# Altium PCB Node_TrashTrack.PcbDoc
Units mm, origin at the board's own origin, x right, y up, seen from the top; angles counter-clockwise.
Board outline 42.75 x 51.3 mm, 4 copper layers (Top Layer, GROUND, POWER, Bottom Layer), stack 1.541 mm thick; 41 components, 32 nets, 170 pads, 272 vias.
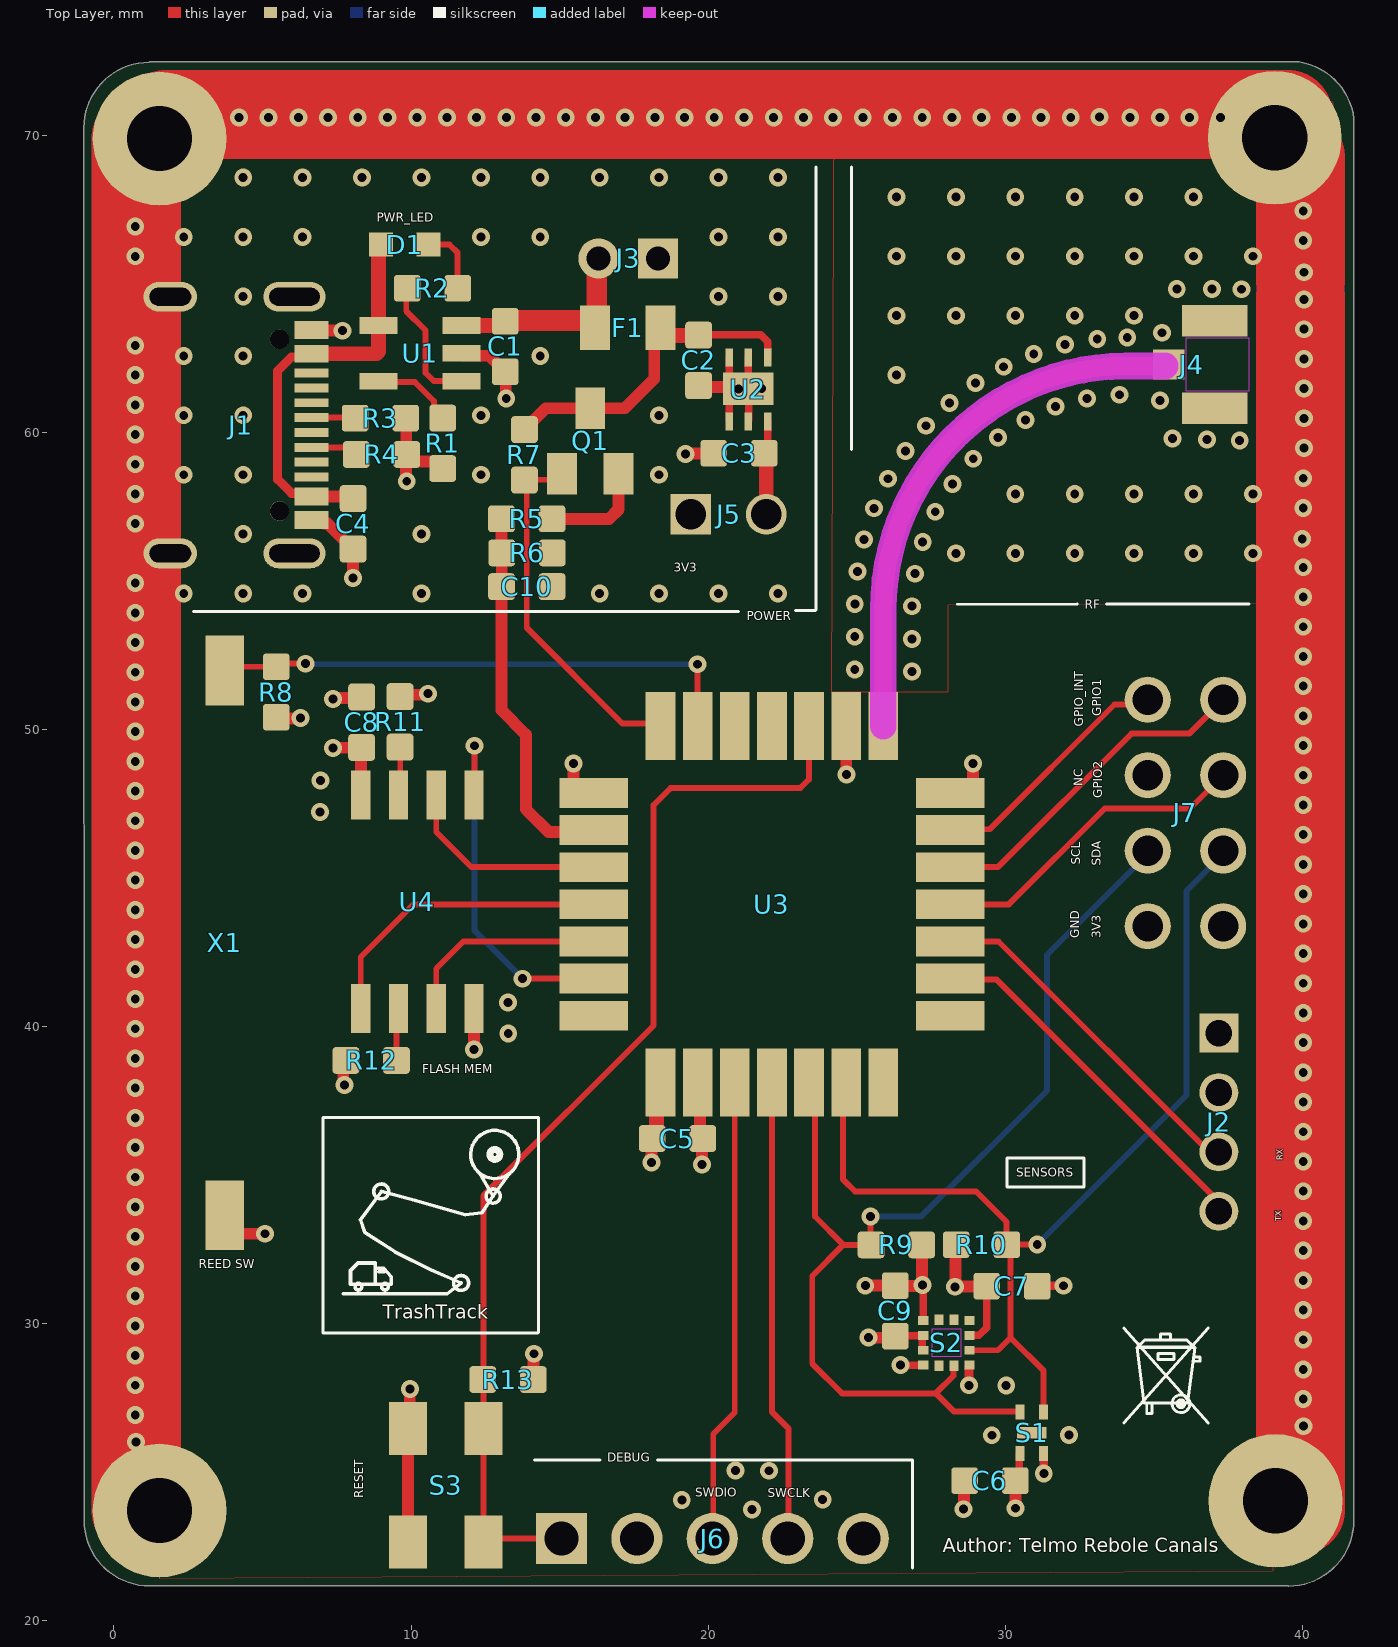
[diagram p0: Top Layer view]
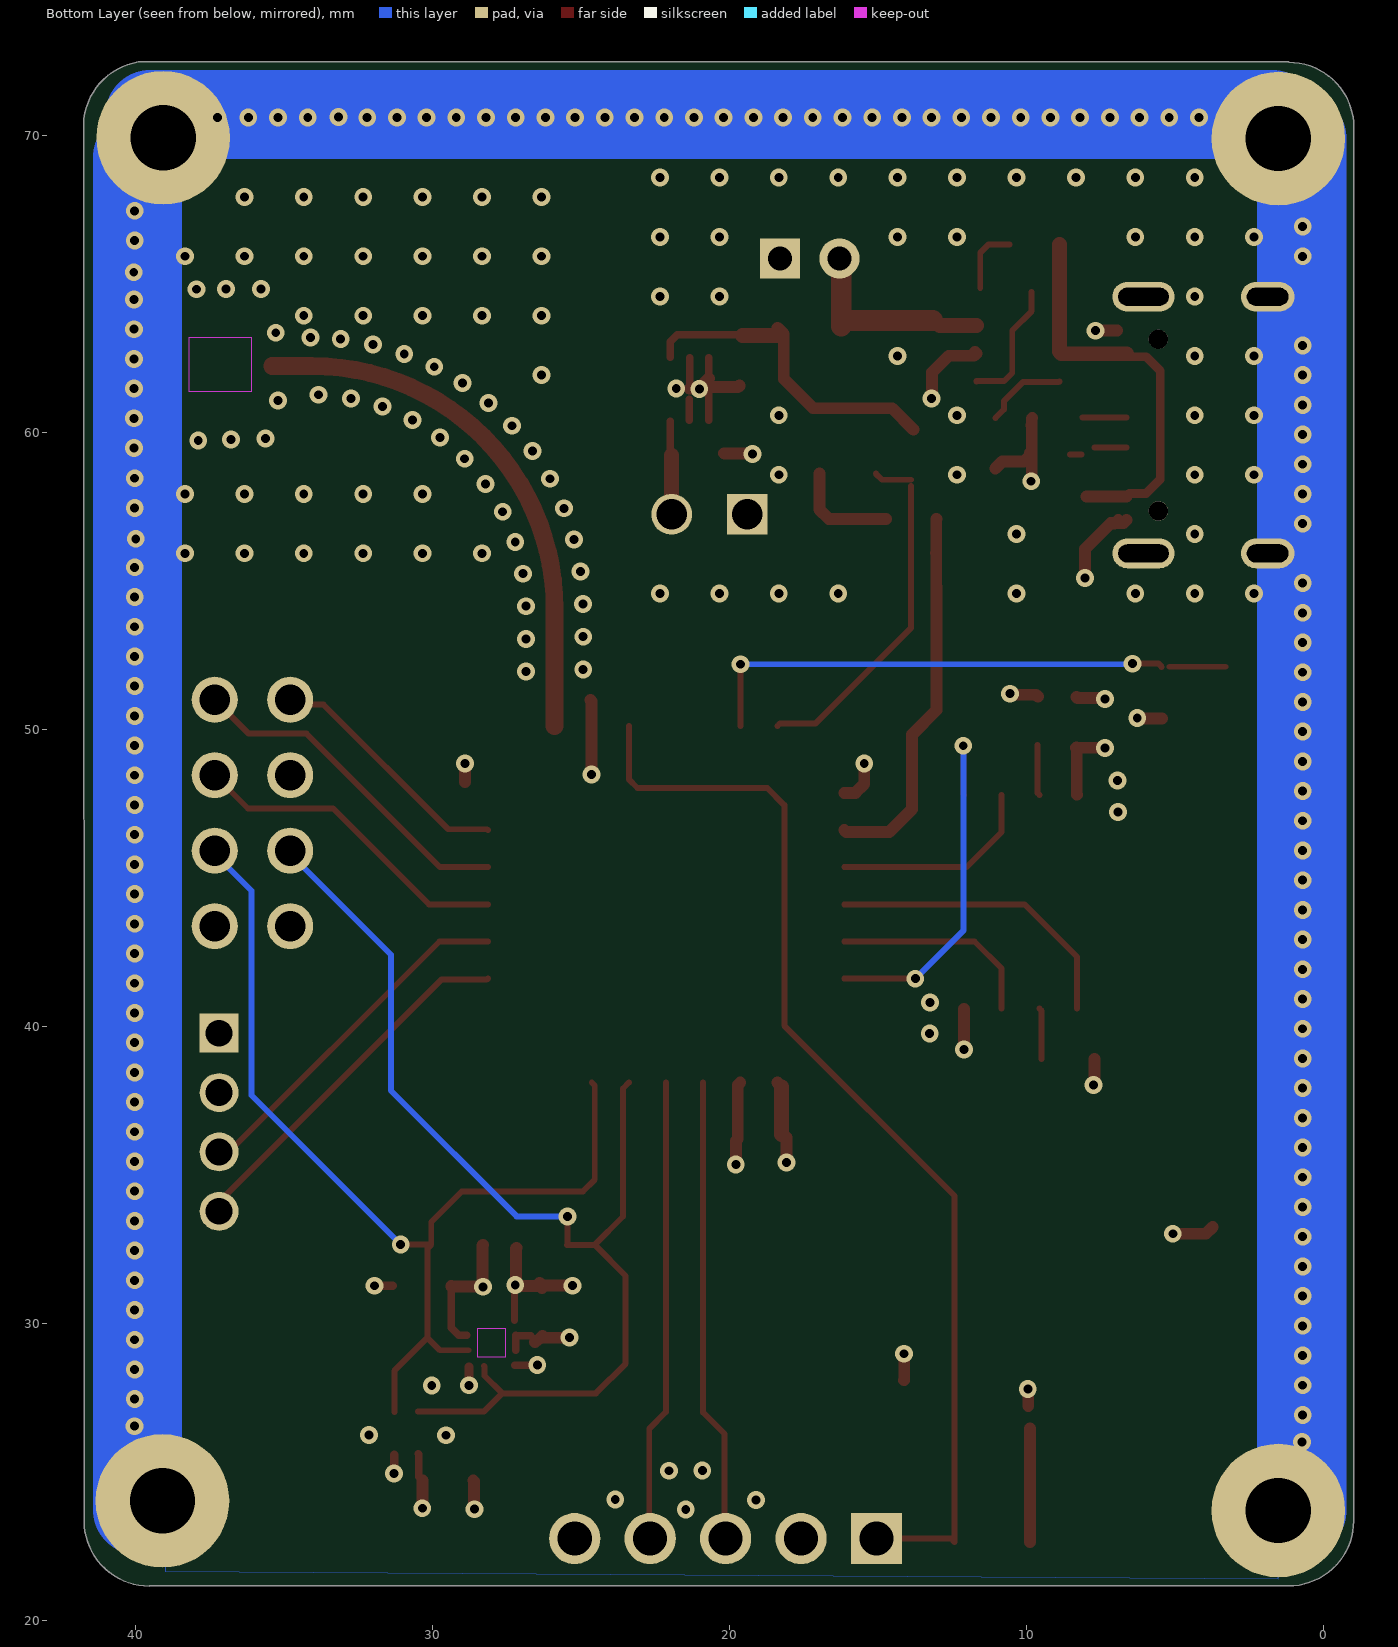
[diagram p1: Bottom Layer view, seen from below]
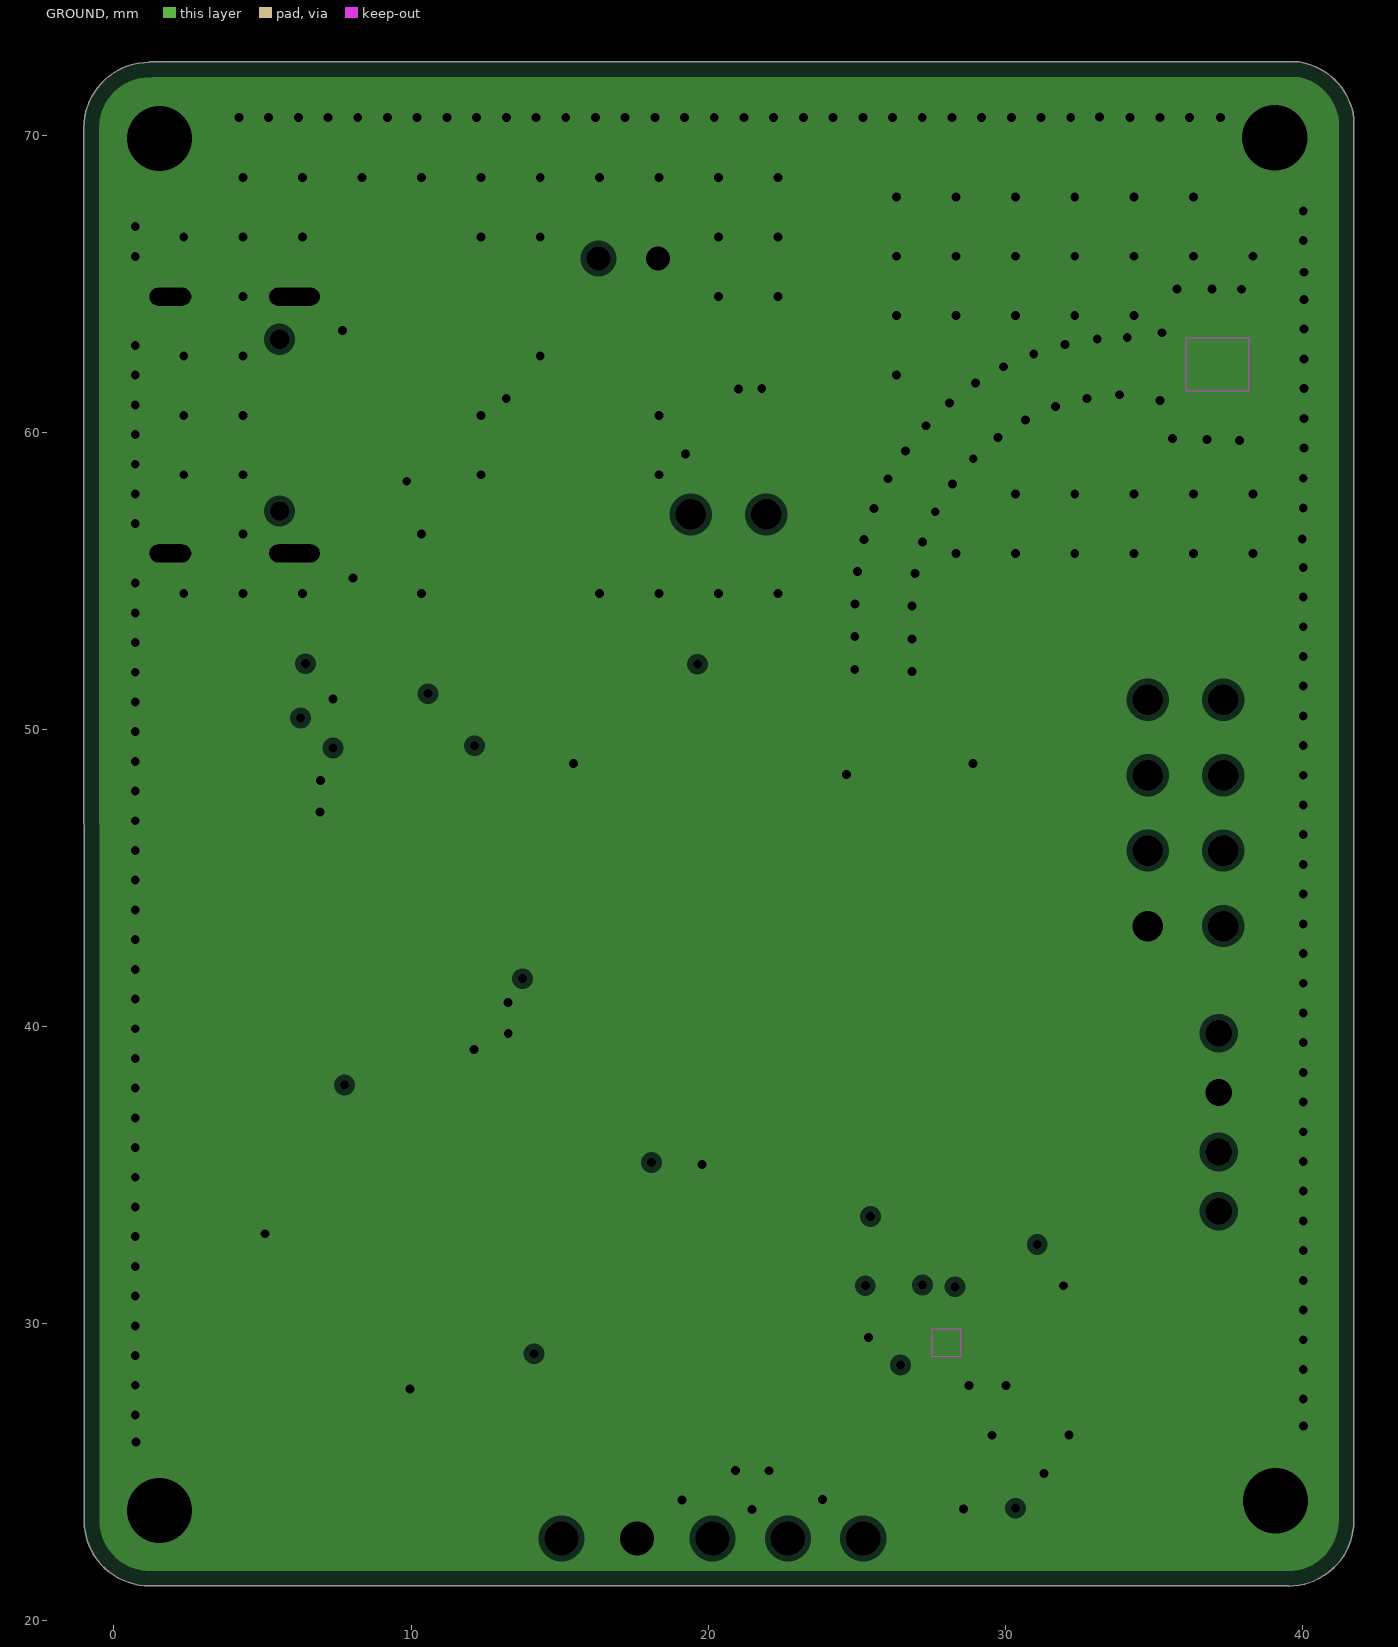
[diagram p2: GROUND, clearances drawn from the general rule]
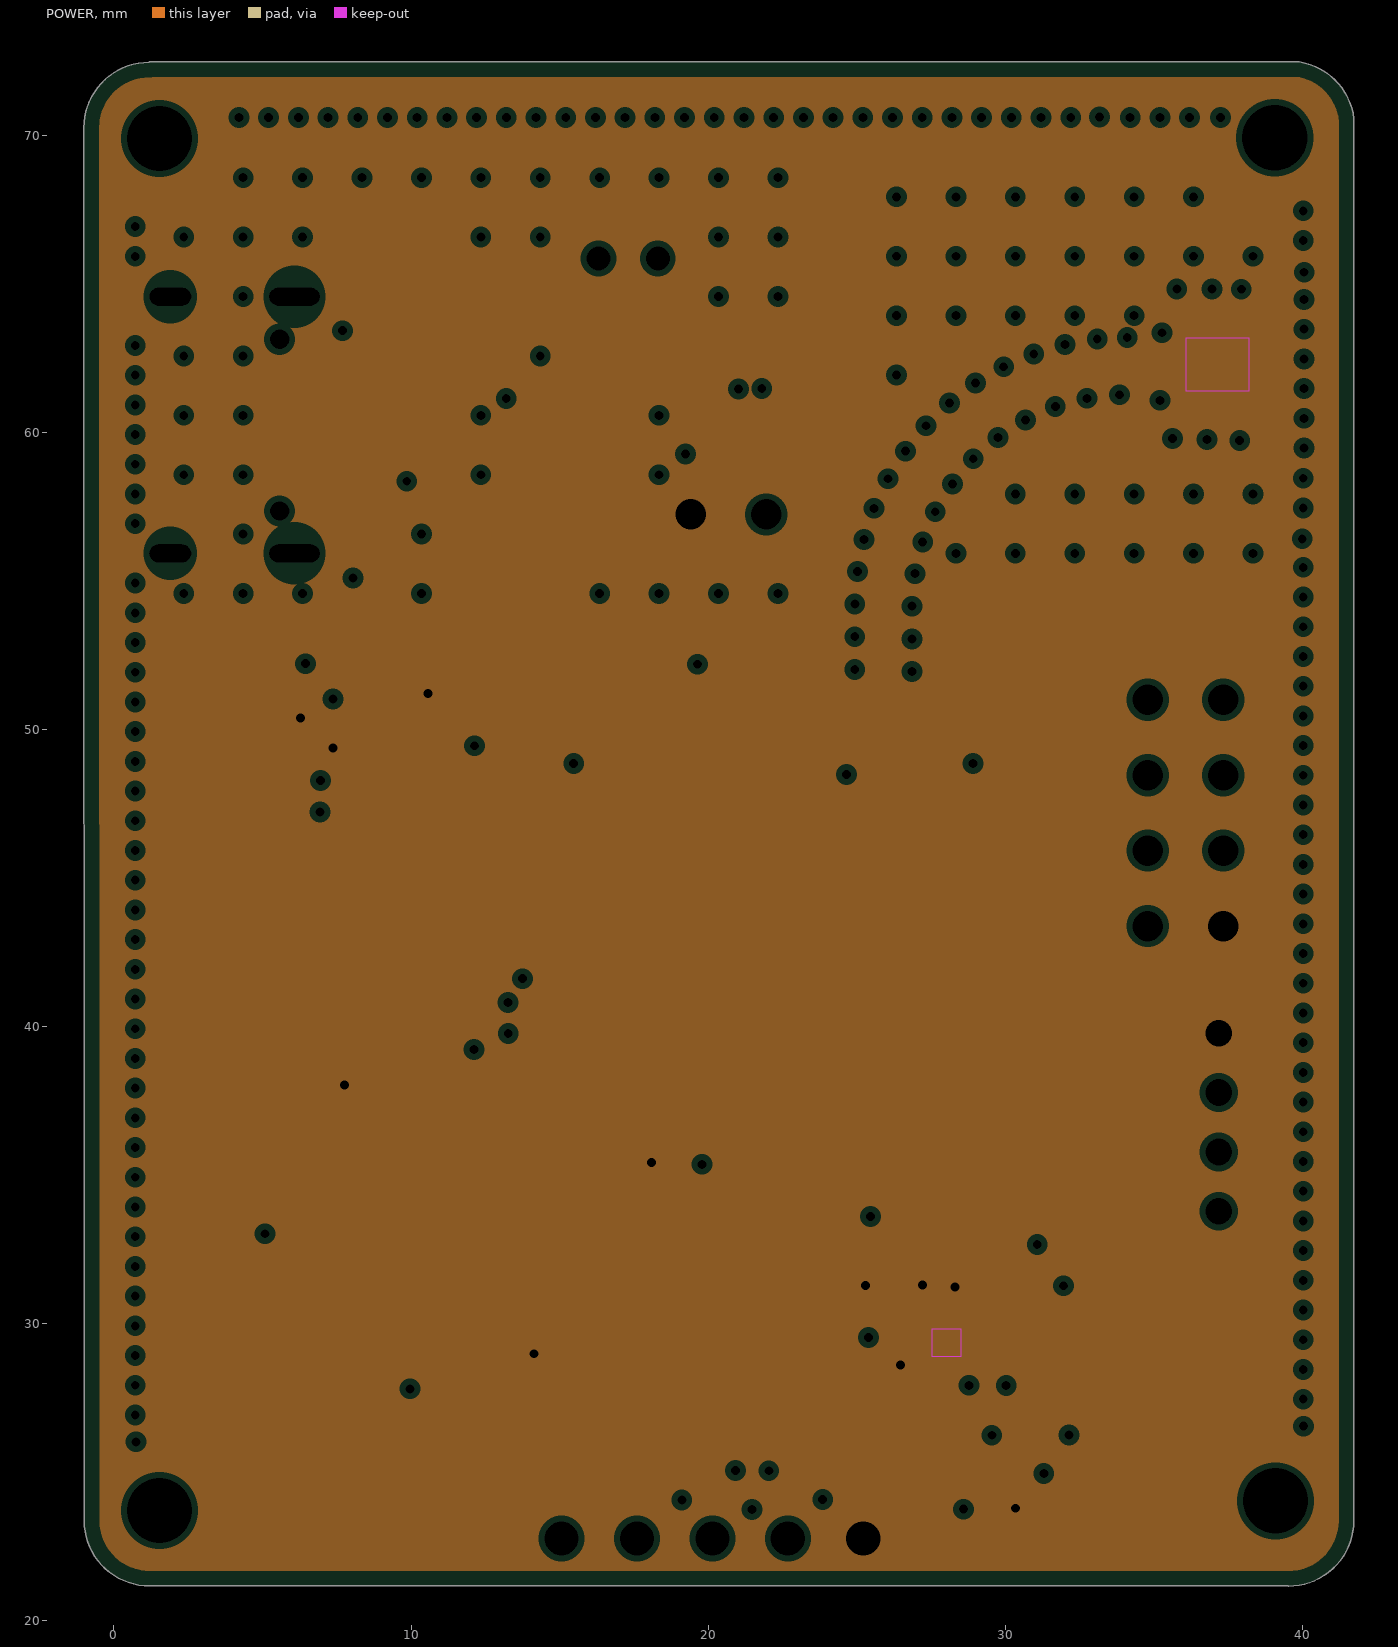
[diagram p3: POWER, clearances drawn from the general rule]
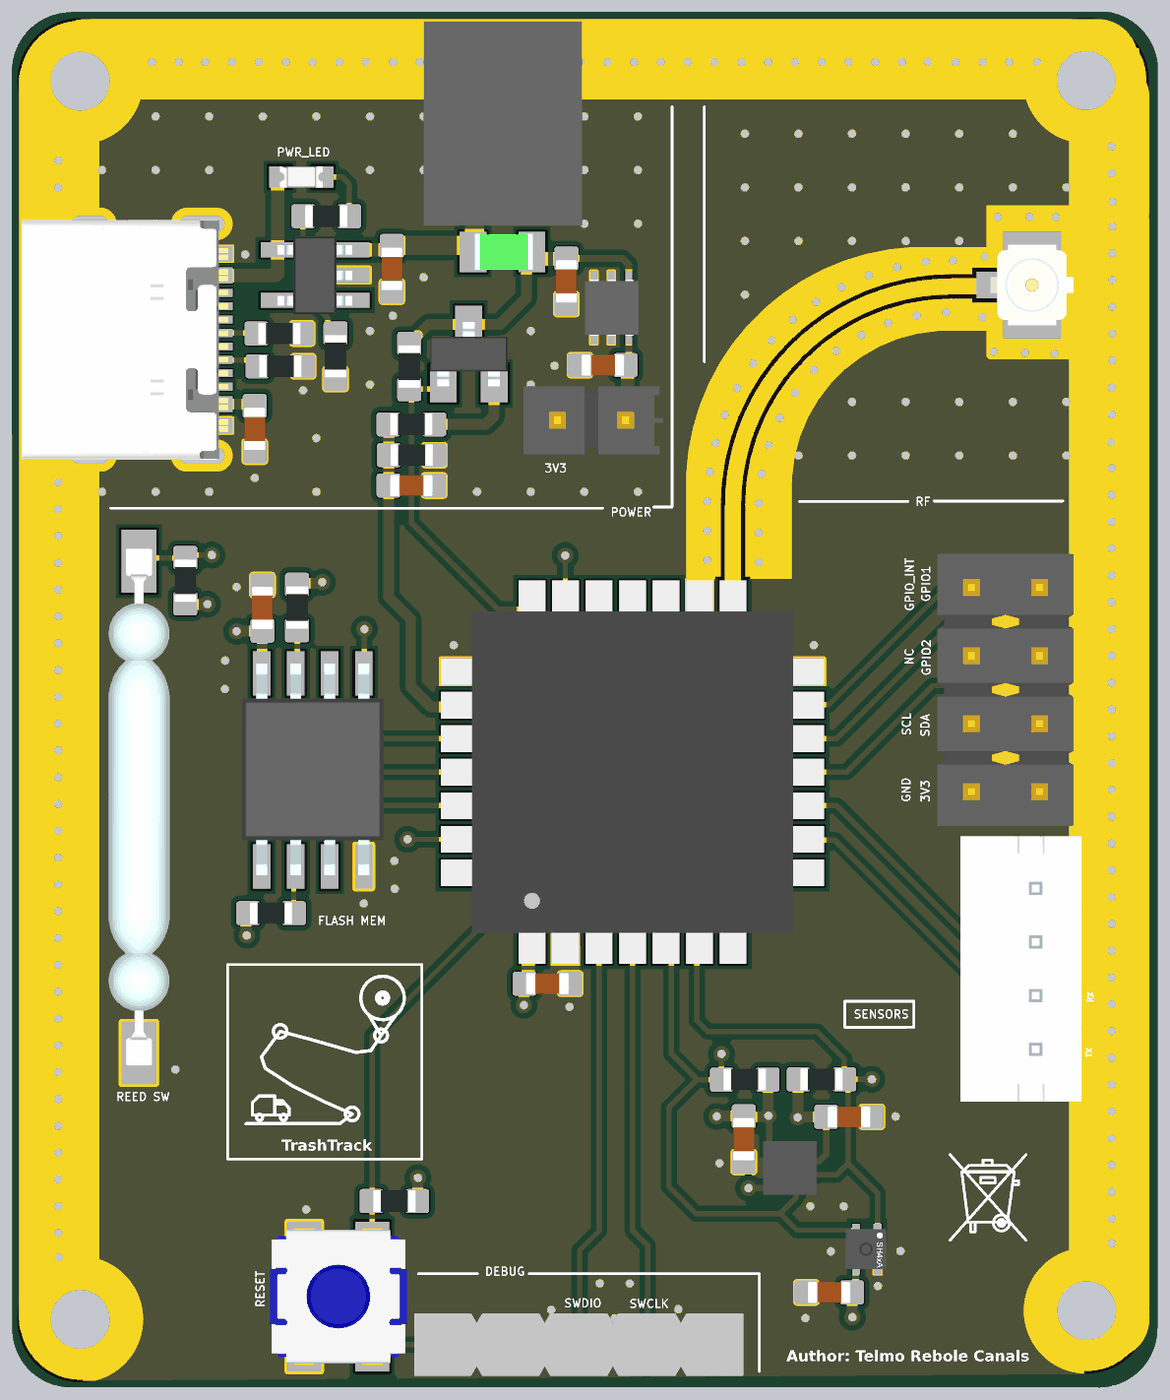
[diagram p4: 3D render of the assembled board from above, using the file's embedded part models]

## Layer stack, top to bottom
Top Solder: solder mask 0.0102, Solder Resist, Dk 3.5
Top Layer: signal copper 0.0356
Dielectric 2: prepreg 0.2, PP-006, Dk 4.2
GROUND: plane copper 0.035, net GND
Dielectric 1: dielectric 1, FR-4, Dk 4.2
POWER: plane copper 0.035, net +3V3
Dielectric 3: prepreg 0.2, PP-006, Dk 4.2
Bottom Layer: signal copper 0.0356
Bottom Solder: solder mask 0.0102, Solder Resist, Dk 3.5

## Board outline
-1,23.36 -1.01,70.25 cw(c1.19,70.25) 1.19,72.45 1.19,72.462 39.903,72.462 cw(c39.556,70.29) 41.74,70.553 41.738,23.36 41.736,23.36 cw(c39.536,23.36) 39.536,21.16 39.536,21.163 1.196,21.164 cw(c1.196,23.36)

## Design rules (kind name [scope] priority, off if disabled: settings)
BoardOutlineClearance [All] p1: gap=0.2 ignorepadtopadclearanceinfootprint=FALSE
Clearance Clearance_RF_track [InPolygonClass('GND_POLYGON_CLASS') vs InNet('RF_IPX')] p1: gap=0.15 ignorepadtopadclearanceinfootprint=FALSE
Clearance Clearance_RF_polygon [InPolygonClass('GND_POLYGON_CLASS') vs IsKeepOut] p2: gap=0 ignorepadtopadclearanceinfootprint=FALSE
Clearance Clearance_J1_PADS [InComponent('J1')] p3: gap=0.15 ignorepadtopadclearanceinfootprint=FALSE
Clearance [All] p4: gap=0.2 ignorepadtopadclearanceinfootprint=FALSE
MinimumSolderMaskSliver MinimumSolderMaskSliver_USB [InComponent('J1')] p1: minsoldermaskwidth=0.05
MinimumSolderMaskSliver [All] p2: minsoldermaskwidth=0.1
PlaneClearance [All] p1: clearance=0.2
PlaneConnect [All] p1: planeconnectstyle=Direct reliefexpansion=0.508 reliefentries=4 reliefconductorwidth=0.254 reliefairgap=0.254
PolygonConnect PolygonConnect_GND [IsPolygon and InNet('GND') vs IsVia and InNet('GND')] p1: connectstyle=Direct reliefconductorwidth=0.254 reliefentries=4 polygonreliefangle="90 Angle" airgapwidth=0.254
PolygonConnect [All] p2: connectstyle=Direct reliefconductorwidth=0.254 reliefentries=4 polygonreliefangle="90 Angle" airgapwidth=0.254
RoutingVias [All] p1: holewidth=0.6 width=0.3 viastyle="Through Hole" minholewidth=0.1 minwidth=0.1 maxholewidth=0.711 maxwidth=1.27
SilkToSilkClearance [All] p1: silktosilkclearance=0.15
SolderMaskExpansion [All] p1: expansion=0.102 istentingtop=FALSE
SupplyNets "Schematic Supply Nets_2" [InNet('GND')] p1: voltage=0.000
SupplyNets "Schematic Supply Nets_1" [InNet('+3V3')] p2: voltage=0.000
Width [All] p1: maxlimit=3 minlimit=0.15 preferedwidth=0.2
26 further rules are at their usual default settings.

## Classes and differential pairs
component class Designator: J6 J7 R13 S3
polygon class GND_POLYGON_CLASS: NONET_L01_P005
component class SENSORS: C6 C7 C9 J2 R8 R9 R10 S1 S2 X1
component class POWER: C1 C2 C3 C4 C10 D1 F1 J1 J3 J5 Q1 R1 R2 R3 R4 R5 R6 R7 U1 U2
component class MEMORY: C8 R11 R12 U4
component class LORA_MCU: C5 J4 U3

## Components (designator, comment, footprint, x,y, rotation, side; value= is the part's Value field where it differs from the comment)
C1 "4.7u" Capacitor_SMD:0603_1608m 13.169,62.885 r270 top
C2 "1u" Capacitor_SMD:0603_1608m 19.68,62.419 r270 top
C3 "1u" Capacitor_SMD:0603_1608m 21.04,59.291 r180 top
C4 "4.7u" Capacitor_SMD:0603_1608m 8.05,56.917 r270 top
C5 "100n" Capacitor_SMD:0603_1608m 18.969,36.223 r0 top
C6 "100n" Capacitor_SMD:0603_1608m 29.486,24.707 r180 top
C7 "100n" Capacitor_SMD:0603_1608m 30.228,31.255 r0 top
C8 "100n" Capacitor_SMD:0603_1608m 8.336,50.238 r90 top
C9 "100n" Capacitor_SMD:0603_1608m 26.302,30.422 r270 top
C10 "100n" Capacitor_SMD:0603_1608m 13.897,54.802 r0 top
D1 "150060VS75000" LEDC1608X70N 9.791,66.314 r180 top
F1 "MF-PSMF020X-2" MF-PSMF020X-2 17.344,63.517 r0 top
J1 "USB_4105" USB4105-GF-A 1.896,60.24 r270 top
J2 "B4B-PH-K-S(LF)(SN)" B4B-PH-K-S(LF)(SN) 36.642,36.772 r90 top
J3 "S2B-PH-K-S(LF)(SN)" S2B-PH-K-S(LF)(SN) 18.31,65.849 r0 top
J4 "U.FL-R-SMT(01)" U.FL-R-SMT(01) 37.056,62.278 r270 top
J5 "TSW-102-07-T-S" TSW-102-07-T-S 20.688,57.234 r0 top
J6 "5-146280-5" HDRV5W67P0X254_1X5_1229X234X821P 15.062,22.759 r0 top
J7 "A2541WV-2x4P" TSW-104-XX-YY-D 37.338,43.374 r90 top
Q1 "BSS84" BS884 16.034,59.706 r0 top
R1 "2k" Resistor_SMD:0603_1608m 11.064,59.627 r270 top
R2 "470" Resistor_SMD:0603_1608m 10.72,64.847 r180 top
R3 "5.1k" Resistor_SMD:0603_1608m 8.969,60.473 r0 top
R4 "5.1k" Resistor_SMD:0603_1608m 9.006,59.249 r0 top
R5 "470k" Resistor_SMD:0603_1608m 13.895,57.083 r180 top
R6 "470k" Resistor_SMD:0603_1608m 13.906,55.937 r0 top
R7 "1M" Resistor_SMD:0603_1608m 13.818,59.24 r90 top
R8 "100k" Resistor_SMD:0603_1608m 5.462,51.253 r90 top
R9 "4.7k" Resistor_SMD:0603_1608m 26.335,32.644 r180 top
R10 "4.7k" Resistor_SMD:0603_1608m 29.2,32.65 r0 top
R11 "10k" Resistor_SMD:0603_1608m 9.629,50.251 r270 top
R12 "10k" Resistor_SMD:0603_1608m 8.658,38.852 r0 top
R13 "10k" Resistor_SMD:0603_1608m 13.262,28.111 r0 top
S1 "SHT40-AD1B-R2" SHT4x_SEN 30.893,26.319 r270 top
S2 "BMA400" BMA400 28.023,29.348 r180 top
S3 "7914J-1-000E" SW_7914J-1-000E 11.17,24.553 r0 top
U1 "MCP73831T-5ACI/OT" MCP73831T-5ACI/OT 10.405,62.653 r180 top
U2 "MCP1700T-3302E/MAY" MCP1700T-3302E/MAY 21.355,61.438 r270 top
U3 "317990687" 317990687 29.386,36.869 r90 top
U4 "W25Q32JVSSIQ" W25Q32JVSSIQ 10.213,44.194 r90 top
X1 "MDSM-4R-12-18" MDSM4R1218 3.726,42.808 r270 top

## Footprints (in the part's own frame and the unit in brackets; to place one, negate y for a bottom-side part, rotate by r counter-clockwise, add the part's x,y. Pads: shape width x height; smd on the part's side, far side on the other; paste and mask are expansions set on the pad)
317990687 [mm]
  rect 2.3x1 smd mask+0.075: 1(1.239,10.989) 2(1.239,9.739) 3(1.239,8.489) 4(1.239,7.239) 5(1.239,5.989) 6(1.239,4.739) 7(1.239,3.489) 15(13.239,3.489) 16(13.239,4.739) 17(13.239,5.989) 18(13.239,7.239) 19(13.239,8.489) 20(13.239,9.739) 21(13.239,10.989)
  rect 1x2.3 smd mask+0.075: 8(3.489,1.239) 9(4.739,1.239) 10(5.989,1.239) 11(7.239,1.239) 12(8.489,1.239) 13(9.739,1.239) 14(10.989,1.239) 22(10.989,13.239) 23(9.739,13.239) 24(8.489,13.239) 25(7.239,13.239) 26(5.989,13.239) 27(4.739,13.239) 28(3.489,13.239)
  body extent 0.09,0.09 14.39,14.39, height 2.49
B4B-PH-K-S(LF)(SN) [mm]
  rect 1.308x1.308 / inner round 1.308 / far side rect 1.308x1.308 hole 0.9: 1(3,-0.55)
  round 1.308 hole 0.9: 2(1,-0.55) 3(-1,-0.55) 4(-3,-0.55)
  body extent -4.95,-2.25 4.95,2.25, height 6
BMA400 [mm]
  rect 0.35x0.3 smd paste-0.025 mask+0.05: 1(-0.775,0.75) 2(-0.775,0.25) 3(-0.775,-0.25) 4(-0.775,-0.75) 7(0.775,-0.75) 8(0.775,-0.25) 9(0.775,0.25) 10(0.775,0.75)
  rect 0.3x0.35 smd paste-0.025 mask+0.05: 5(-0.25,-0.775) 6(0.25,-0.775) 11(0.25,0.775) 12(-0.25,0.775)
  Keep-Out Layer region: 0.475,-0.475 -0.475,-0.475 -0.475,0.475 0.475,0.475
  body extent -1,-1 1,1, height 1
BS884 [mm] "PMOS"
  rect 1x1.4 smd paste+0 mask+0.102: 1(-0.95,-1.1) 2(0.95,-1.1) 3(0,1.1)
  body extent -1.45,-1.2 1.45,1.2, height 1.11
Capacitor_SMD:0603_1608m [mm] "Generic SMD capacitor. Size 0603 (1608 metric)"
  rrect25% 0.9x0.9 smd mask+0.05: 1(-0.85,0) 2(0.85,0)
  body extent -0.8,-0.4 0.8,0.4, height 0.9
HDRV5W67P0X254_1X5_1229X234X821P [mm]
  rect 1.725x1.725 / inner round 1.725 / far side rect 1.725x1.725 hole 1.15: 1(0,0)
  round 1.725 hole 1.15: 2(2.54,0) 3(5.08,0) 4(7.62,0) 5(10.16,0)
  body extent -1.07,-1.17 11.23,1.17, height 5.84
LEDC1608X70N [mm]
  rect 0.8x0.8 smd paste+0 mask+0.1: 1(-0.8,0)
  rect 0.8x0.8 smd: 2(0.8,0)
  body extent -0.8,-0.4 0.8,0.4, height 0.71
MCP1700T-3302E/MAY [mm]
  rect 0.6x0.25 smd mask+0.05: 1(-1.075,0.65) 2(-1.075,0) 3(-1.075,-0.65) 4(1.075,-0.65) 5(1.075,0) 6(1.075,0.65)
  rect 1.1x1.7 smd mask+0.05: 7(-0.025,0)
  body extent -1.04,-0.97 1.06,1.03, height 0.9
MCP73831T-5ACI/OT [mil]
  rect 50x22 smd paste+0 mask+3.15: 1(-51,37) 2(-51,0) 3(-51,-37) 4(59.06,-37)
  rect 50x22 smd paste+0 mask+3.54: 5(59.06,37)
  body extent -51,-57 59,57, height 57
MDSM4R1218 [mm]
  rect 2.34x1.3 smd: 1(-9.17,0) 2(9.17,0)
  body extent -9.65,-1.13 9.65,1.14, height 2.54
MF-PSMF020X-2 [mm]
  rect 1x1.5 smd: 1(-1.15,0)
  rect 1x1.5 smd mask+0.1: 2(1.05,0)
  body extent -1.07,-0.67 1.07,0.67, height 0.85
Resistor_SMD:0603_1608m [mm] "Generic SMD resistor. Size 0603 (1608 metric)"
  rrect25% 0.9x0.9 smd mask+0.05: 1(-0.85,0) 2(0.85,0)
  body extent -0.8,-0.4 0.8,0.4, height 0.45
S2B-PH-K-S(LF)(SN) [mm]
  rect 1.35x1.35 / inner round 1.35 / far side rect 1.35x1.35 hole 0.8: 1(0,0)
  round 1.35 hole 0.8: 2(-2,0)
  body extent -3.95,-1.35 1.95,6.25, height 4.8
SHT4x_SEN [mm]
  rect 0.5x0.3 smd paste+0 mask+0.04: 1(-0.7,0.4) 2(-0.7,-0.4) 3(0.7,-0.4) 4(0.7,0.4)
  rect 0.4x1 smd paste+0 mask+0.04: 5(0,0)
  body extent -0.75,-0.78 0.75,0.72, height 0.54
SW_7914J-1-000E [mm]
  rect 1.27x1.78 smd: 1(-1.27,1.905) 2(-1.27,-1.905) 3(1.27,-1.905) 4(1.27,1.905)
  body extent -2.57,-2.55 2.57,2.55, height 3.99
TSW-102-07-T-S [mm]
  rect 1.37x1.37 / inner round 1.37 / far side rect 1.37x1.37 hole 1.02: 01(-1.27,0)
  round 1.37 hole 1.02: 02(1.27,0)
  body extent -2.61,-1.27 2.6,1.27, height 9.27
TSW-104-XX-YY-D [mm]
  round 1.55 hole 1.02: 1(0,0) 2(0,2.54) 3(2.54,0) 4(2.54,2.54) 5(5.08,0) 6(5.08,2.54) 7(7.62,0) 8(7.62,2.54)
  body extent -1.27,-1.27 8.89,3.81, height 8.38
U.FL-R-SMT(01) [mm]
  rect 1.05x2.2 smd: 1(-1.475,0) 2(1.475,0)
  rect 1x1.05 smd: 3(0,-1.55)
  Keep-Out Layer region: 0.9,-0.963 -0.903,-0.963 -0.903,1.15 0.9,1.15
  body extent -1.5,-1.55 1.5,1.55, height 1.25
USB4105-GF-A [mm]
  rect 0.6x1.15 smd mask+0.05: A1_B12(-3.2,4.755) A4_B9(-2.4,4.755) B1_A12(3.2,4.755) B4_A9(2.4,4.755)
  rect 0.3x1.15 smd mask+0.05: A5(-1.25,4.755) A6(-0.25,4.755) A7(0.25,4.755) A8(1.25,4.755) B5(1.75,4.755) B6(0.75,4.755) B7(-0.75,4.755) B8(-1.75,4.755)
  oval 1x2.1 hole 0.6 slot 1.7 at 90 deg: SH1(-4.32,4.18) SH2(4.32,4.18)
  oval 1x1.8 hole 0.6 slot 1.4 at 90 deg: SH3(-4.32,0) SH4(4.32,0)
  round 0.65 hole 0.65 unplated mask+0.05: ""(-2.89,3.68) ""(2.89,3.68)
  body extent -4.47,-2.54 4.47,5.16, height 3.26
W25Q32JVSSIQ [mm]
  rect 1.65x0.65 smd: 1(-3.6,1.905) 2(-3.6,0.635) 3(-3.6,-0.635) 4(-3.6,-1.905) 5(3.6,-1.905) 6(3.6,-0.635) 7(3.6,0.635) 8(3.6,1.905)
  body extent -3.93,-2.64 3.97,2.64, height 2.16

## Part data
C1 C2 C3 C4 C5 C6 C7 C8 C9 C10: library part Generic_Capacitor
D1: "WL-SMCW SMT Mono-Color Chip LED Waterclear 0603, Bright Green, Typ.(@20mA): 570nm, 40mcd, 2.0V, 140 AlInGaP", Manufacturer_Name="Wurth Elektronik", Mouser Part Number=710-150060VS75000, Datasheet Link=https://www.we-online.com/catalog/datasheet/150060VS75000.pdf, Geometry.Height=0.7mm, Manufacturer_Part_Number=150060VS75000, Mouser Price/Stock=https://www.mouser.co.uk/ProductDetail/Wurth-Elektronik/150060VS75000?qs=LlUlMxKIyB1Q1Bi5mQ%2FKLw%3D%3D
F1: Manufacturer_Name=Bourns, Mouser Part Number=652-MF-PSMF020X-2, Arrow Part Number=MF-PSMF020X-2, Arrow Price/Stock=https://www.arrow.com/en/products/mf-psmf020x-2/bourns?utm_currency=USD&region=europe, Datasheet Link=https://www.bourns.com/pdfs/mfpsmf.pdf, Geometry.Height=0.85mm, Manufacturer_Part_Number=MF-PSMF020X-2, Mouser Price/Stock=https://www.mouser.co.uk/ProductDetail/Bourns/MF-PSMF020X-2?qs=B2dI1vFk2x%2FnZ%252B%252BDoGvxDQ%3D%3D
J4: Package=None, Availability="In Stock", Check_prices=https://www.snapeda.com/parts/U.FL-R-SMT(01)/Hirose+Electric+Co+Ltd/view-part/?ref=eda, MF=Hirose, MP=U.FL-R-SMT(01), Price=None, Purchase-URL=https://pricing.snapeda.com/search/part/U.FL-R-SMT(01)/?ref=eda, SnapEDA_Link=https://www.snapeda.com/parts/U.FL-R-SMT(01)/Hirose+Electric+Co+Ltd/view-part/?ref=snap
J5: "<a href=\"https://pricing.snapeda.com/parts/TSW-102-07-T-S/Samtec/view-part?ref=eda\">Check availability</a>", Package=None, Availability=Unavailable, MF="{'manufacturer': u'Samtec'}", MP=TSW-102-07-T-S, Price=None
J6: "TE CONNECTIVITY - 5-146280-5 - CONNECTOR, BOARD-TO-BOARD 07AH5929", Manufacturer_Name="TE Connectivity", Mouser Part Number=571-5-146280-5, Arrow Part Number=5-146280-5, Arrow Price/Stock=https://www.arrow.com/en/products/5-146280-5/te-connectivity?utm_currency=USD&region=nac, Datasheet Link=https://www.te.com/commerce/DocumentDelivery/DDEController?Action=showdoc&DocId=Customer+Drawing%7F146280%7FH2%7Fpdf%7FEnglish%7FENG_CD_146280_H2.pdf%7F5-146280-5, Geometry.Height=8.21mm, Manufacturer_Part_Number=5-146280-5, Mouser Price/Stock=https://www.mouser.co.uk/ProductDetail/TE-Connectivity/5-146280-5?qs=bwpFY26eRVfu6g6nYAoViA%3D%3D
J7: library part TSW-104-07-T-D, Manufacturer_Name=SAMTEC, Mouser Part Number=200-TSW10407TD, Arrow Part Number=TSW-104-07-T-D, Arrow Price/Stock=https://www.arrow.com/en/products/tsw-104-07-t-d/samtec?utm_currency=USD&region=europe, Datasheet Link=http://suddendocs.samtec.com/prints/tsw-xxx-xx-xxx-x-xx-xxx-mkt.pdf, Manufacturer_Part_Number=TSW-104-07-T-D, Mouser Price/Stock=https://www.mouser.co.uk/ProductDetail/Samtec/TSW-104-07-T-D?qs=hzq9O0YpnZtBZCcLzm8dag%3D%3D
Q1: "P-Channel 50 V 130mA (Ta) 225mW (Ta) Surface Mount SOT-23-3 (TO-236)", Package=None, Check_prices=https://www.snapeda.com/parts/BSS84/Onsemi/view-part/?ref=eda, MF=onsemi, MP=BSS84, SnapEDA_Link=https://www.snapeda.com/parts/BSS84/Onsemi/view-part/?ref=snap
R1 R2 R3 R4 R5 R6 R7 R8 R9 R10 R11 R12 R13: library part "Generic Resistor"
S3: "Switch Tactile N.O. SPST Round Button J-Hook 0.1A 16VAC 16VDC 100000Cycles 2.94N SMD T/R", Package=None, Check_prices=https://www.snapeda.com/parts/7914J-1-000E./Bourns/view-part/?ref=eda, MF=Bourns, MP=7914J-1-000E., SnapEDA_Link=https://www.snapeda.com/parts/7914J-1-000E./Bourns/view-part/?ref=snap
U4: Manufacturer_Name=Winbond, Mouser Part Number=454-W25Q32JVSSIQ, Arrow Part Number=W25Q32JVSSIQ, Arrow Price/Stock=https://www.arrow.com/en/products/w25q32jvssiq/winbond-electronics?utm_currency=USD&region=nac, Datasheet Link=https://www.winbond.com/hq/search-resource-file.jsp?partNo=W25Q32JVSSIQ&type=datasheet, Geometry.Height=2.16mm, Manufacturer_Part_Number=W25Q32JVSSIQ, Mouser Price/Stock=https://www.mouser.co.uk/ProductDetail/Winbond/W25Q32JVSSIQ?qs=qSfuJ%252Bfl%2Fd4PGZSN0WxfCA%3D%3D
X1: "LITTELFUSE - MDSM-4R-12-18 - REED SW, SPST-NO, 0.5A, 200VDC, SMD", Manufacturer_Name=LITTELFUSE, Mouser Part Number=934-MDSM-4R12-18, Arrow Part Number=MDSM-4R-12-18, Arrow Price/Stock=https://www.arrow.com/en/products/mdsm-4r-12-18/littelfuse?region=europe, Datasheet Link=https://media.digikey.com/pdf/DataSheets/HamlinPDFs/MDSM-4R.pdf, Geometry.Height=2.84mm, Manufacturer_Part_Number=MDSM-4R-12-18, Mouser Price/Stock=https://www.mouser.co.uk/ProductDetail/Littelfuse/MDSM-4R-12-18?qs=nyo4TFax6NeuFOer0%2FvGlw%3D%3D

## Free pads (board coordinates)
  round 4.5 hole 2.2 mask+0.102: 8(1.535,23.701) 8(1.535,69.885) 8(39.074,69.911) 8(39.098,24.026)

## Via types
v1: diameter 0.6, hole 0.3, Top Layer to Bottom Layer, tented both sides, 272 vias

## Nets (pads, with @x,y where several pads share a name; then routed paths per layer and width w, separated by ;. In a path a pad name is that pad's centre, name@x,y a point inside that pad or via, vN(x,y) a via of type N, cw(c..) or ccw(c..) an arc to the next point about the centre after c; other vN are vias at no path point)
3V3_MULT: C3.1 J5.02 U2.6 | length 3
  Top Layer w0.2: C3.1 C3.1@21.958,59.223
  Top Layer w0.25: C3.1@22.005,59.406 U2.6
  Top Layer w0.5: J5.02 C3.1@21.958,59.223
+3V3: C5.1 C6.1 C7.1 C8.1 C9.1 J2.1 J5.01 J6.5 J7.1 R8.1 R9.1 R10.1 R11.1 R12.1 R13.2 S1.3 S2.3 S2.7 S2.10 U3.1 U4.8 | length 20.8
  Top Layer w0.25: v1(26.479,28.598) S2.10 ; S2.7 v1@27.248,31.269 ; S2.3@28.851,29.598 29.118,29.598 29.378,29.858 C7.1 ; C6.1 30.468,24.839 30.468,25.594 S1.3
  Top Layer w0.4: R8.1@5.449,50.369 v1@6.277,50.369 ; v1(7.372,49.367) 7.382,49.377 C8.1@8.326,49.377 ; v1@7.718,38.061 R12.1@7.718,38.904 ; U4.8 8.322,47.808 8.322,49.374 C8.1@8.326,49.377 ; C8.1 C8.1@8.326,49.377 ; C8.1@8.343,49.377 C8.1@8.326,49.377 ; R11.1 9.688,51.16 10.531,51.16 v1(10.569,51.198) ; R13.2@14.141,28.087 14.127,28.101 14.127,28.966 v1(14.141,28.98) ; v1(18.094,35.419) C5.1@18.094,36.262 ; C5.1 C5.1@18.258,36.362 ; U3.1@18.258,37.969 U3.1 ; v1@25.302,31.281 C9.1@26.311,31.281 ; C9.1 C9.1@26.311,31.281 ; C9.1@26.318,31.187 26.389,31.258 27.183,31.258 v1(27.221,31.296) 27.203,31.314 27.203,32.525 R9.1@27.179,32.549 ; C9.1@26.348,31.281 C9.1@26.311,31.281 ; C9.1@26.401,31.371 C9.1@26.311,31.281 ; v1(28.31,31.233) v1@28.321,31.244 ; R10.1@28.31,32.643 28.33,32.623 28.33,31.253 v1@28.321,31.244 ; C7.1 29.367,31.244 v1@28.321,31.244 ; C6.1 30.343,24.7 30.343,23.787 v1(30.35,23.78)
  Top Layer w0.5: C5.1@18.258,36.362 U3.1@18.258,37.969
  other v1: 25.291,31.27 7.756,38.023 6.284,50.376
BAT_aDC: C10.1 R5.2 R6.1 U3.23 | length 12.7
  Top Layer w0.4: R5.2 13.051,57.077 13.051,55.942 R6.1 13.052,55.932 13.052,54.807 C10.1 13.047,50.639 13.867,49.819 13.867,47.307 14.631,46.543 16.082,46.543 U3.23
CS_FLASH: U3.25 U4.1 | length 10.3
  Top Layer w0.2: U4.1 8.308,42.333 10.083,44.108 U3.25
EN_BAT_MEAS_N: Q1.1 R7.1 U3.21 | length 11.9
  Top Layer w0.2: R7.1@13.895,58.19 13.895,53.412 17.119,50.188 18.317,50.188 U3.21 ; R7.1@13.895,58.4 14.878,58.4 Q1.1
GND: C1.2 C2.2 C3.2 C4.2 C5.2 C6.2 C7.2 C8.2 C9.2 C10.2 J1.A1_B12 J1.B1_A12 J1.SH1 J1.SH2 J1.SH3 J1.SH4 J2.2 J3.1 J4.1 J4.2 J6.2 J7.2 pad.8 R1.2 R3.2 R4.2 R6.2 S1.4 S2.1 S2.8 S2.9 S3.1 S3.2 U1.2 U2.2 U2.3 U2.4 U2.5 U2.7 U3.2 U3.14 U3.16 U3.22 U4.4 X1.2 | length 295.7
  Top Layer w0.25: U2.7@20.705,61.813 U2.3 ; U2.4@20.715,60.407 U2.7@20.715,61.457 ; U2.7 U2.2 ; U2.5@21.365,60.407 U2.7@21.365,61.107 ; C9.2@26.691,29.582 S2.8@27.191,29.582 ; S2.9@27.205,29.098 S2.8@27.205,29.598
  Top Layer w0.3: v1(28.784,27.917) S2.1@28.784,28.53 ; v1@31.296,24.951 S1.4@31.296,25.569 ; C7.2@31.35,31.269 v1(31.963,31.269)
  Top Layer w0.4: X1.2@3.745,33.246 3.973,33.018 v1(5.088,33.018) ; J1.B1_A12 6.751,56.94 7.177,56.94 C4.2 ; J1.B1_A12@6.926,57.04 J1.B1_A12@7.049,56.917 ; J1.A1_B12@6.96,63.421 v1@7.62,63.42 ; v1(7.373,51.017) 7.408,51.052 8.3,51.052 C8.2 ; v1(8.048,55.088) 8.049,55.089 8.049,56.06 C4.2@8.048,56.061 ; R3.2 9.838,60.454 9.838,59.268 R4.2 ; v1@9.837,58.366 R4.2@9.837,59.231 ; R3.2@9.849,60.234 R3.2@9.851,60.236 ; S3.2 S3.1 ; R4.2@9.905,59.298 R4.2 ; S3.1@9.955,27.218 v1@9.955,27.784 ; R1.2 10.828,59.013 10.092,59.013 R4.2 ; U1.2@11.745,62.697 U1.2 11.78,62.573 12.631,62.573 C1.2 13.188,62.017 13.188,61.152 v1(13.206,61.134) ; v1(12.118,39.217) U4.4@12.118,40.581 ; v1(15.474,48.851) 15.474,48.158 15.774,47.858 U3.22 ; v1@19.248,59.28 20.178,59.28 C3.2 ; U3.2 19.733,38.022 19.733,36.204 19.798,36.139 v1(19.798,35.355) ; C2.2@19.666,61.555 C2.2 19.733,61.516 20.965,61.516 v1(21.027,61.454) ; U2.7@20.705,61.813 21.055,61.463 U2.7 ; v1(24.656,48.481) 24.652,48.486 24.652,50.136 24.656,50.141 24.656,50.942 U3.16@24.693,50.979 ; v1@25.402,29.518 C9.2@26.373,29.518 ; C9.2 C9.2@26.552,29.375 ; v1(28.598,23.747) 28.617,23.766 28.617,24.688 C6.2 ; U3.14@28.913,48.221 v1(28.914,48.849) ; v1@31.296,24.951 v1(31.3,24.947)
  Top Layer w3: pad.8@0.75,23.701 pad.8@0.75,69.885 ; pad.8@1.742,70.697 pad.8@39.509,70.697 ; pad.8@39.938,23.725 v1@39.938,64.572 ; 39.938,65.111 pad.8@39.938,69.255
  Bottom Layer w3: pad.8@0.75,23.701 pad.8@0.75,69.885 ; pad.8@1.742,70.697 pad.8@39.509,70.697 ; pad.8@39.938,23.725 pad.8@39.938,69.255
  other v1: 21.482,23.738 19.114,24.056 23.856,24.078 20.926,25.045 22.044,25.04 0.74,26.014 29.55,26.236 32.148,26.247 40.038,26.541 0.717,26.92 40.033,27.451 9.969,27.798 0.717,27.92 30.033,27.914 40.033,28.451 0.717,28.92 40.033,29.451 25.396,29.524 0.717,29.92 40.033,30.451 0.717,30.92 40.033,31.451 0.717,31.92 40.033,32.451 0.717,32.92 40.033,33.451 0.717,33.92 40.033,34.451 0.717,34.92 40.033,35.451 0.717,35.92 40.033,36.451 0.717,36.92 40.033,37.451 0.717,37.92 40.033,38.451 0.717,38.92 40.033,39.451 13.272,39.756 0.717,39.92 40.033,40.451 13.259,40.801 0.717,40.92 40.033,41.451 0.717,41.92 40.033,42.451 0.717,42.92 40.033,43.451 0.717,43.92 40.033,44.451 0.717,44.92 40.033,45.451 0.717,45.92 40.033,46.451 0.717,46.92 6.936,47.213 40.033,47.451 0.717,47.92 6.949,48.272 40.033,48.451 0.717,48.92 40.033,49.451 0.717,49.92 40.033,50.451 0.717,50.92 40.033,51.451 0.717,51.92 26.858,51.943 24.936,52.016 40.033,52.451 0.717,52.92 26.858,53.043 24.936,53.116 40.033,53.451 0.717,53.92 26.859,54.143 24.939,54.216 40.033,54.451 2.35,54.568 4.35,54.568 6.35,54.568 10.35,54.568 16.35,54.568 18.35,54.568 20.35,54.568 22.35,54.568 0.717,54.92 26.964,55.238 25.029,55.312 40.033,55.451 28.341,55.922 30.341,55.922 32.341,55.922 34.341,55.922 36.341,55.922 38.341,55.922 27.222,56.307 25.246,56.391 39.998,56.411 4.35,56.568 10.35,56.568 0.717,56.92 27.646,57.322 25.586,57.437 40.033,57.451 0.717,57.92 30.341,57.922 32.341,57.922 34.341,57.922 36.341,57.922 38.341,57.922 28.221,58.26 9.855,58.348 26.053,58.433 40.033,58.451 2.35,58.568 4.35,58.568 12.35,58.568 18.35,58.568 0.717,58.92 28.924,59.106 19.237,59.268 26.643,59.361 40.054,59.467 37.893,59.721 36.792,59.752 35.628,59.791 29.756,59.826 0.717,59.92 27.336,60.215 30.685,60.414 40.054,60.467 2.35,60.568 4.35,60.568 12.35,60.568 18.35,60.568 31.688,60.866 0.717,60.92 28.124,60.983 35.206,61.072 32.753,61.139 33.847,61.259 21.804,61.466 40.054,61.467 28.998,61.651 0.717,61.92 26.341,61.922 29.949,62.203 40.054,62.467 2.35,62.568 4.35,62.568 14.35,62.568 30.96,62.637 0.717,62.92 32.014,62.95 33.098,63.139 34.109,63.19 35.283,63.346 7.694,63.417 40.054,63.467 26.341,63.922 28.341,63.922 30.341,63.922 32.341,63.922 34.341,63.922 40.054,64.467 4.35,64.568 20.35,64.568 22.35,64.568 35.777,64.817 36.962,64.817 37.949,64.812 40.063,65.385 0.717,65.92 26.341,65.922 28.341,65.922 30.341,65.922 32.341,65.922 34.341,65.922 36.341,65.922 38.341,65.922 40.033,66.451 2.35,66.568 4.35,66.568 6.35,66.568 12.35,66.568 14.35,66.568 20.35,66.568 22.35,66.568 0.717,66.92 40.033,67.451 26.341,67.922 28.341,67.922 30.341,67.922 32.341,67.922 34.341,67.922 36.341,67.922 4.35,68.568 6.35,68.568 8.35,68.568 10.35,68.568 12.35,68.568 14.35,68.568 16.35,68.568 18.35,68.568 20.35,68.568 22.35,68.568 4.207,70.596 5.207,70.596 6.207,70.596 7.207,70.596 8.207,70.596 9.207,70.596 10.207,70.596 11.207,70.596 12.207,70.596 13.207,70.596 14.207,70.596 15.207,70.596 16.207,70.596 17.207,70.596 18.207,70.596 19.207,70.596 20.207,70.596 21.207,70.596 22.207,70.596 23.207,70.596 24.207,70.596 25.207,70.596 26.207,70.596 27.207,70.596 28.207,70.596 29.207,70.596 30.207,70.596 31.207,70.596 32.207,70.596 34.207,70.596 35.207,70.596 36.207,70.596 37.244,70.592 33.176,70.61
MISO_FLASH: U3.26 U4.3 | length 7
  Top Layer w0.2: U4.3 10.848,41.945 11.761,42.858 U3.26
MOSI_FLASH: U3.27 U4.5 | length 12.6
  Top Layer w0.2: U4.5 12.141,47.817 v1(12.141,49.446) ; v1(13.755,41.605) 16.144,41.605 U3.27
  Bottom Layer w0.2: v1(12.141,49.446) 12.141,43.219 v1(13.755,41.605)
NetD1_1: D1.1 R2.1 | length 2.3
  Top Layer w0.2: D1.1 11.297,66.314 11.57,66.041 R2.1
NetJ1_A6: J1.A6 R3.1 | length 1.5
  Top Layer w0.2: J1.A6 6.658,60.496 8.122,60.496 R3.1@8.129,60.503
NetJ1_B6: J1.B6 R4.1 | length 1.5
  Top Layer w0.2: J1.B6 6.653,59.488 R4.1@7.724,59.488 ; R4.1@8.156,59.251 8.554,59.251 R4.1@8.556,59.249
NetJ7_5: J7.5 U3.11 | length 11
  Top Layer w0.2: U3.11 30.125,44.108 33.352,47.335 36.219,47.335 J7.5
NetJ7_7: J7.7 U3.12 | length 11.5
  Top Layer w0.2: U3.12 29.755,45.358 34.251,49.854 36.198,49.854 J7.7
NetJ7_8: J7.8 U3.13 | length 8.6
  Top Layer w0.2: U3.13 28.173,46.634 29.48,46.634 33.68,50.834 34.75,50.834 J7.8@34.941,51.025
NetQ1_2: Q1.2 R5.1 | length 3.6
  Top Layer w0.4: R5.1 16.67,57.083 16.984,57.397 Q1.2
NetR1_1: R1.1 U1.5 | length 2.8
  Top Layer w0.2: U1.5 8.932,61.686 10.136,61.686 10.775,61.047 10.775,60.766 R1.1
NetR2_2: R2.2 U1.1 | length 4.3
  Top Layer w0.2: R2.2@9.84,64.719 9.84,64.073 10.492,63.421 10.492,61.994 10.765,61.721 11.693,61.721 U1.1
NetR11_2: R11.2 U4.7 | length 1.7
  Top Layer w0.2: U4.7 9.638,47.854 R11.2@9.638,49.475
NetR12_2: R12.2 U4.2 | length 1.7
  Top Layer w0.2: R12.2@9.505,38.899 9.505,40.521 U4.2
NRST: J6.1 R13.1 S3.3 S3.4 U3.17 | length 37.2
  Top Layer w0.2: J6.1 12.551,22.759 S3.3 S3.4 12.435,26.463 12.435,28.111 12.435,34.296 18.162,40.023 18.162,47.446 18.74,48.024 23.105,48.024 23.397,48.316 U3.17
REED_INT: R8.2 U3.20 X1.1 | length 18.2
  Top Layer w0.2: X1.1@3.309,52.104 R8.2@5.195,52.104 ; R8.2 5.566,52.207 v1(6.446,52.207) ; v1(19.639,52.189) 19.639,50.116 U3.20
  Bottom Layer w0.2: v1@6.446,52.189 v1(19.639,52.189)
RF_IPX: J4.3 U3.15 | length 18.1
  Top Layer w0.6: U3.15 25.897,54.05 cw(c34.076,54.05) 34.076,62.229 J4.3@35.4,62.229
RX_US: J2.3 U3.10 | length 11.9
  Top Layer w0.2: U3.10 29.774,42.858 J2.3@37.026,35.606
SCK_FLASH: U3.24 U4.6 | length 7
  Top Layer w0.2: U4.6 10.848,46.543 12.033,45.358 U3.24
SCL_MCU: J7.4 R9.2 S1.2 S2.12 U3.5 | length 38.4
  Top Layer w0.2: U3.5 23.596,37.909 23.596,33.599 24.551,32.644 ; v1(25.467,33.602) 25.467,32.662 R9.2 24.551,32.644 ; S2.12 28.257,28.557 28.257,28.239 27.664,27.646 ; S1.2@30.493,27.028 28.282,27.028 27.664,27.646 ; 24.551,32.644 23.506,31.598 23.506,28.647 24.507,27.646 27.664,27.646
  Bottom Layer w0.2: v1(25.467,33.602) 27.173,33.602 31.406,37.835 31.406,42.41 J7.4@34.941,45.945
SDA_MCU: J7.3 R10.2 S1.1 S2.2 U3.6 | length 34.8
  Top Layer w0.2: U3.6 24.547,38.008 24.547,34.841 24.948,34.44 29.023,34.44 30.05,33.413 R10.2 ; S2.2 29.76,29.098 30.18,29.518 ; v1(31.078,32.658) 31.07,32.65 R10.2 ; S1.1 31.293,28.406 30.181,29.518 ; R10.2 30.181,32.519 30.181,29.518
  Bottom Layer w0.2: v1(31.078,32.658) 36.101,37.681 36.101,44.565 J7.3@37.481,45.945
SWCLK: J6.4 U3.4 | length 15.6
  Top Layer w0.2: U3.4 22.147,27.022 22.712,26.457 J6.4@22.712,22.759
SWDIO: J6.3 U3.3 | length 15.6
  Top Layer w0.2: J6.3@20.172,22.759 20.172,26.277 20.897,27.002 U3.3
TX_US: J2.4 U3.9 | length 12.4
  Top Layer w0.2: U3.9 28.184,41.571 29.712,41.571 J2.4@37.352,33.932
USB_VBUS: C4.1 D1.2 J1.A4_B9 J1.B4_A9 U1.4 | length 13.6
  Top Layer w0.3: J1.B4_A9 6.551,57.94 5.981,57.94 5.51,58.411 5.51,62.069 5.981,62.54 6.551,62.54 J1.A4_B9
  Top Layer w0.4: J1.B4_A9 C4.1@7.988,57.84
  Top Layer w0.5: J1.A4_B9 8.834,62.64 8.905,62.711 U1.4 D1.2@8.905,66.314
VBAT_FUSED: C2.1 F1.2 Q1.3 R7.2 U2.1 | length 11.1
  Top Layer w0.25: C2.1@19.574,63.278 21.772,63.278 22.005,63.045 U2.1
  Top Layer w0.4: R7.2 14.534,60.806 17.198,60.806 18.185,61.793 18.185,63.308 F1.2
  Top Layer w0.5: F1.2@18.401,63.253 C2.1@19.574,63.253
VBAT_RAW: C1.1 F1.1 J3.2 U1.3 | length 6.3
  Top Layer w0.4: F1.1 F1.1@16.252,63.575 ; J3.2@16.252,65.791 J3.2
  Top Layer w0.5: U1.3 C1.1@12.933,63.593
  Top Layer w0.7: C1.1@13.169,63.759 F1.1@15.883,63.759 ; F1.1@16.252,63.575 J3.2@16.252,65.791
pads on no net: J1. J1.A5 J1.A7 J1.A8 J1.B5 J1.B7 J1.B8 J7.6 S1.5 S2.4 S2.5 S2.6 S2.11 U3.7 U3.8 U3.18 U3.19 U3.28

## Polygon pours and split planes (outlines as drawn)
GND on Top Layer "NONET_L01_P005" (solid, shelved, pour order 5): 24.149,51.258 28.08,51.258 28.088,54.198 41.088,54.246 41.043,71.111 24.23,71.154 24.149,51.278
GND on Top Layer "NONET_L01_P010" (solid, shelved, pour order 10): 1.535,69.864 39.18,69.89 39.009,21.657 1.535,21.414
GND on Bottom Layer "NONET_L04_P009" (solid, shelved, pour order 9): 1.535,69.885 39.18,69.911 39.009,21.657 1.535,21.414
no net on Top Solder "NONET_L-01_P-001" (solid, shelved): 24.078,51.325 28.09,51.325 28.09,54.749 cw(c33.919,54.749) 33.919,60.578 35.349,60.578 35.349,59.502 39.391,59.512 39.413,65.246 35.349,65.246 35.349,63.7 33.045,63.7 ccw(c33.045,54.804) 24.149,54.804 24.149,51.278
+3V3 on POWER (split plane): 39.886,71.949 40.047,71.909 40.203,71.853 40.353,71.782 40.496,71.696 40.629,71.598 40.752,71.486 40.864,71.363 40.962,71.23 41.048,71.087 41.119,70.937 41.175,70.781 41.215,70.62 41.23,70.521 41.228,23.38 41.226,23.36 41.227,23.347 41.219,23.194 41.195,23.03 41.155,22.869 41.099,22.713 41.028,22.563 40.942,22.42 40.844,22.287 40.732,22.164 40.609,22.052 40.476,21.954 40.333,21.868 40.183,21.797 40.027,21.741 39.866,21.701 39.702,21.677 39.57,21.67 39.565,21.671 39.536,21.673 1.196,21.674 1.183,21.673 1.031,21.68 0.867,21.705 0.706,21.745 0.55,21.801 0.4,21.871 0.258,21.957 0.125,22.055 0.003,22.167 -0.109,22.289 -0.207,22.422 -0.293,22.564 -0.363,22.714 -0.419,22.87 -0.459,23.031 -0.484,23.195 -0.491,23.344 -0.489,23.36 -0.5,70.25 -0.501,70.263 -0.493,70.416 -0.469,70.58 -0.429,70.741 -0.373,70.897 -0.302,71.047 -0.216,71.19 -0.118,71.323 -0.006,71.446 0.117,71.558 0.25,71.656 0.393,71.742 0.543,71.813 0.699,71.869 0.86,71.909 1.024,71.933 1.177,71.941 1.19,71.94 1.29,71.949 1.297,71.952 39.866,71.952
GND on GROUND (split plane): 39.886,71.949 40.047,71.909 40.203,71.853 40.353,71.782 40.496,71.696 40.629,71.598 40.752,71.486 40.864,71.363 40.962,71.23 41.048,71.087 41.119,70.937 41.175,70.781 41.215,70.62 41.23,70.521 41.228,23.38 41.226,23.36 41.227,23.347 41.219,23.194 41.195,23.03 41.155,22.869 41.099,22.713 41.028,22.563 40.942,22.42 40.844,22.287 40.732,22.164 40.609,22.052 40.476,21.954 40.333,21.868 40.183,21.797 40.027,21.741 39.866,21.701 39.702,21.677 39.57,21.67 39.565,21.671 39.536,21.673 1.196,21.674 1.183,21.673 1.031,21.68 0.867,21.705 0.706,21.745 0.55,21.801 0.4,21.871 0.258,21.957 0.125,22.055 0.003,22.167 -0.109,22.289 -0.207,22.422 -0.293,22.564 -0.363,22.714 -0.419,22.87 -0.459,23.031 -0.484,23.195 -0.491,23.344 -0.489,23.36 -0.5,70.25 -0.501,70.263 -0.493,70.416 -0.469,70.58 -0.429,70.741 -0.373,70.897 -0.302,71.047 -0.216,71.19 -0.118,71.323 -0.006,71.446 0.117,71.558 0.25,71.656 0.393,71.742 0.543,71.813 0.699,71.869 0.86,71.909 1.024,71.933 1.177,71.941 1.19,71.94 1.29,71.949 1.297,71.952 39.866,71.952

## Keep-outs
Top Layer:
  lines w0.9: 25.897,50.108 25.897,54.05 cw(c34.076,54.05) 34.076,62.229 35.381,62.229

## Silkscreen, mask and mechanical layers (free items; w line width, h text height)
Top Overlay:
  circle w0.12: c12.82,35.688 r0.112
  circle w0.12: c12.82,35.688 r0.224
  circle w0.12: c12.764,34.288 r0.238
  circle w0.12: c8.998,34.442 r0.252
  circle w0.12: c11.686,31.362 r0.252
  circle w0.12: c9.124,31.236 r0.112
  circle w0.12: c8.228,31.236 r0.112
  circle w0.1: c35.915,27.297 r0.04
  circle w0.1: c35.915,27.297 r0.3
  circle w0.1: c35.915,27.297 r0.13
  lines w0.1: 2.676,53.958 21.03,53.958 ; 7.031,36.928 14.27,36.928 ; 7.037,29.694 7.037,36.933 ; 7.042,29.681 14.281,29.681 ; 14.157,25.4 16.363,25.401 ; 14.285,29.697 14.285,36.936 ; 18.292,25.4 26.883,25.4 ; 22.94,53.998 23.616,53.999 ; 23.625,54.021 23.625,68.924 ; 24.83,59.421 24.83,68.924 ; 26.883,25.374 26.885,21.76 ; 28.388,54.208 32.425,54.21 ; 30.066,34.599 30.066,35.565 32.645,35.566 ; 30.069,34.595 32.648,34.596 ; 32.649,34.597 32.649,35.563 ; 33.403,54.222 38.207,54.224 ; 33.995,26.647 36.835,29.847 ; 33.995,29.847 36.835,26.647 ; 34.765,27.327 34.765,26.967 34.935,26.967 34.935,27.327 ; 35.227,29.451 35.227,29.641 35.567,29.641 35.567,29.451 ; 36.365,28.867 36.555,28.867 36.555,28.727 36.395,28.727 ; 34.435,29.197 36.395,29.197 36.135,27.327 34.675,27.327 34.435,29.197 ; 34.462,29.213 36.344,29.213 36.112,29.445 34.694,29.445 34.462,29.213 ; 35.145,28.79 35.145,28.99 35.675,28.99 35.675,28.79 35.145,28.79
  lines w0.12: 7.724,30.998 11.224,30.998 11.686,31.362 10.664,31.81 9.474,32.398 8.438,33.07 8.298,33.49 8.998,34.442 10.118,34.148 11.826,33.658 12.386,33.728 12.764,34.288 ; 8.802,31.852 9.082,31.852 9.334,31.572 9.334,31.32 8.802,31.32 ; 8.914,31.74 9.096,31.74 ; 12.299,35.059 12.764,34.288 ; 12.32,36.328 ccw(c12.82,35.688) 12.348,36.349 ; 13.317,35.045 12.764,34.288 ; 8.802,31.32 7.962,31.32 7.962,31.782 8.214,32.034 8.802,32.034 8.802,31.32
  text "PWR_LED" at 8.842,67.092 h0.3
  text "3V3" at 18.836,55.303 h0.3
  text "RF" at 32.678,54.059 h0.3
  text "POWER" at 21.297,53.665 h0.3
  text "GPIO1" at 33.241,50.433 h0.3 r90
  text "GPIO_INT" at 32.632,50.087 h0.3 r90
  text "NC" at 32.618,48.082 h0.3 r90
  text "GPIO2" at 33.259,47.682 h0.3 r90
  text "SCL" at 32.519,45.446 h0.3 r90
  text "SDA" at 33.211,45.401 h0.3 r90
  text "GND" at 32.501,42.963 h0.3 r90
  text "3V3" at 33.223,42.959 h0.3 r90
  text "FLASH MEM" at 10.371,38.429 h0.3
  text "RX" at 39.335,35.492 h0.2 r90
  text "SENSORS" at 30.372,34.942 h0.3
  text "TX" at 39.287,33.446 h0.2 r90
  text "REED SW" at 2.846,31.863 h0.3
  text "TrashTrack" at 9.049,29.997 h0.8
  text "DEBUG" at 16.612,25.347 h0.3
  text "SWDIO" at 19.568,24.159 h0.3
  text "SWCLK" at 21.999,24.142 h0.3
  text "RESET" at 8.399,24.117 h0.3 r90
  text "Author: Telmo Rebole Canals" at 27.892,22.136 h0.8
Mechanical Board:
  lines w0.1: -1,23.36 ccw(c1.196,23.36) 1.196,21.164 39.536,21.163 ; -1,23.36 -1.01,70.25 cw(c1.19,70.25) 1.19,72.45 ; 1.19,72.462 39.903,72.462 cw(c39.556,70.29) 41.74,70.553 41.738,23.36 ; 39.536,21.16 ccw(c39.536,23.36) 41.736,23.36